# Allegro board backup.brd
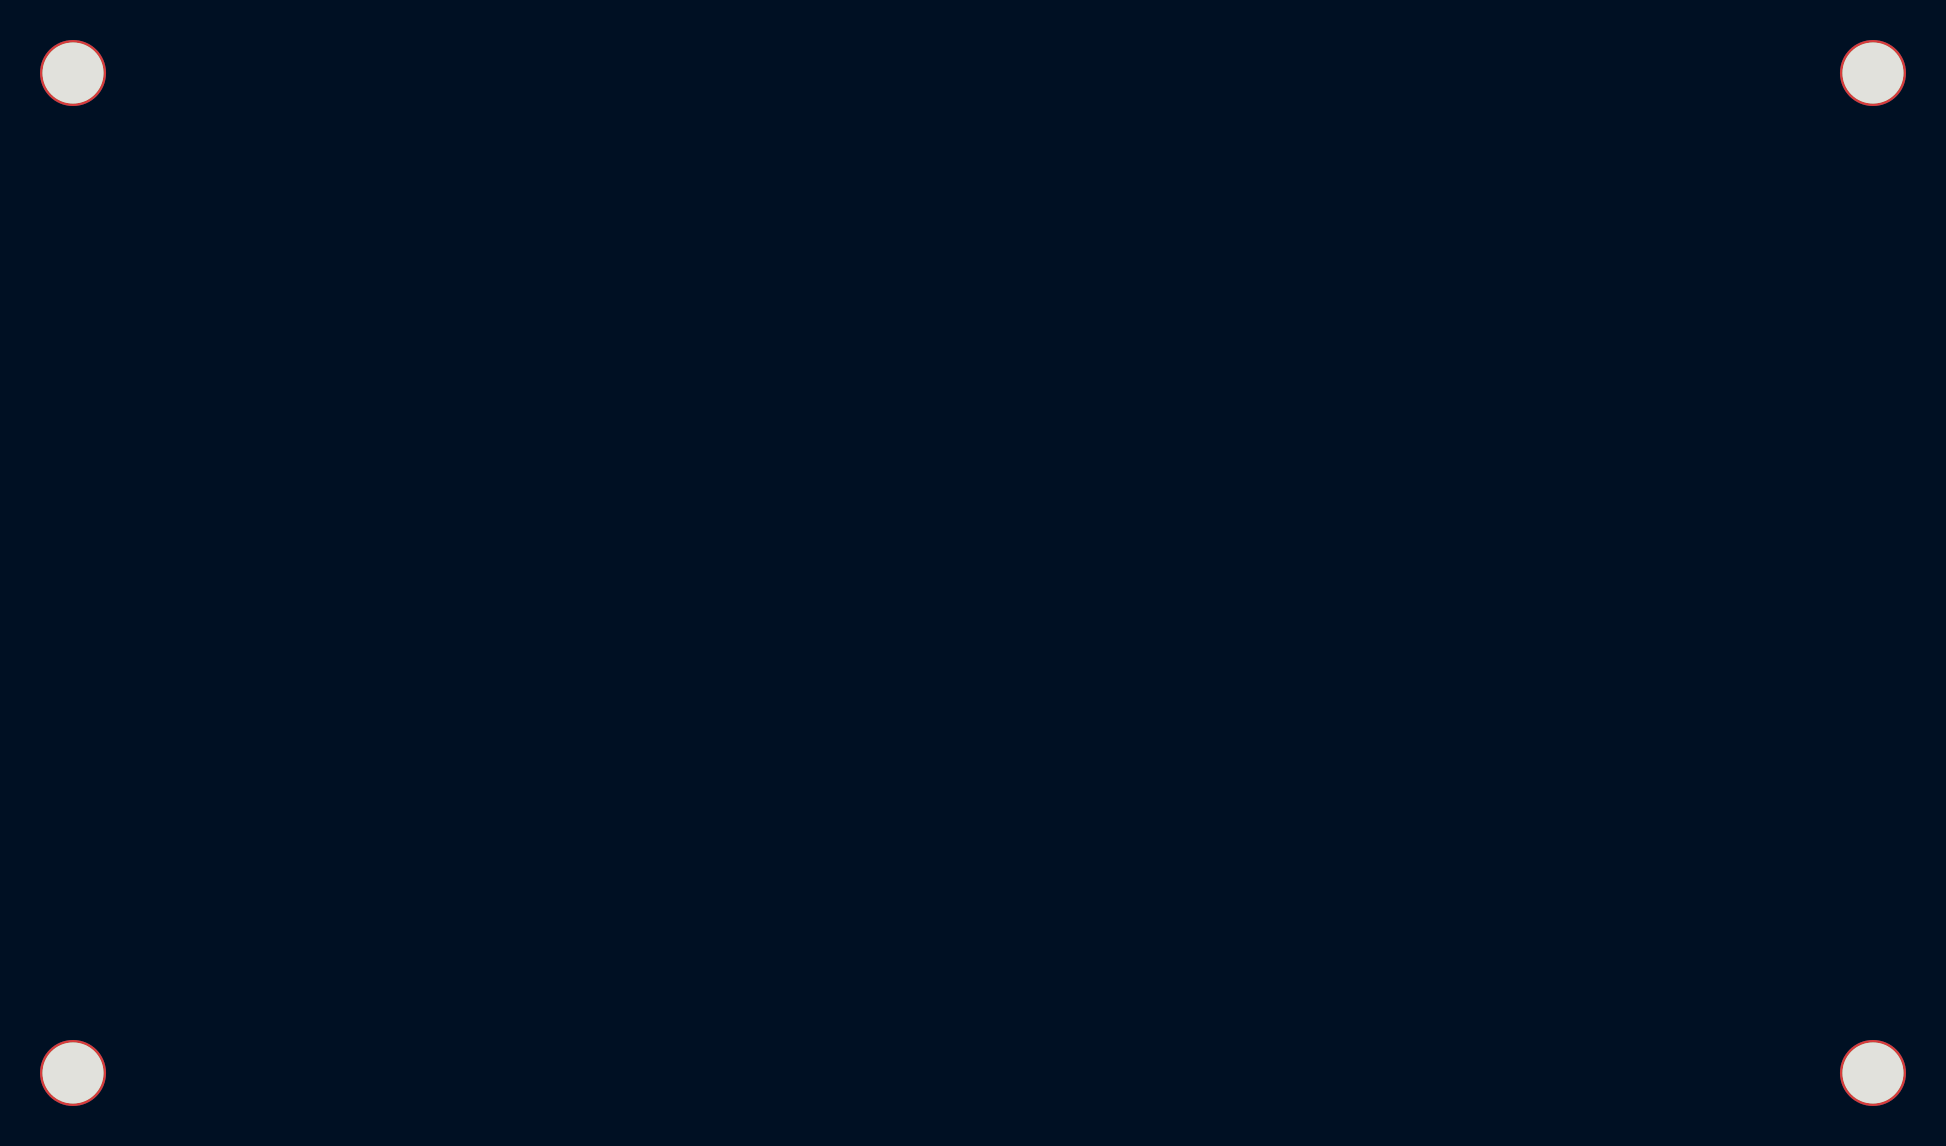
[diagram p0: board, top side]
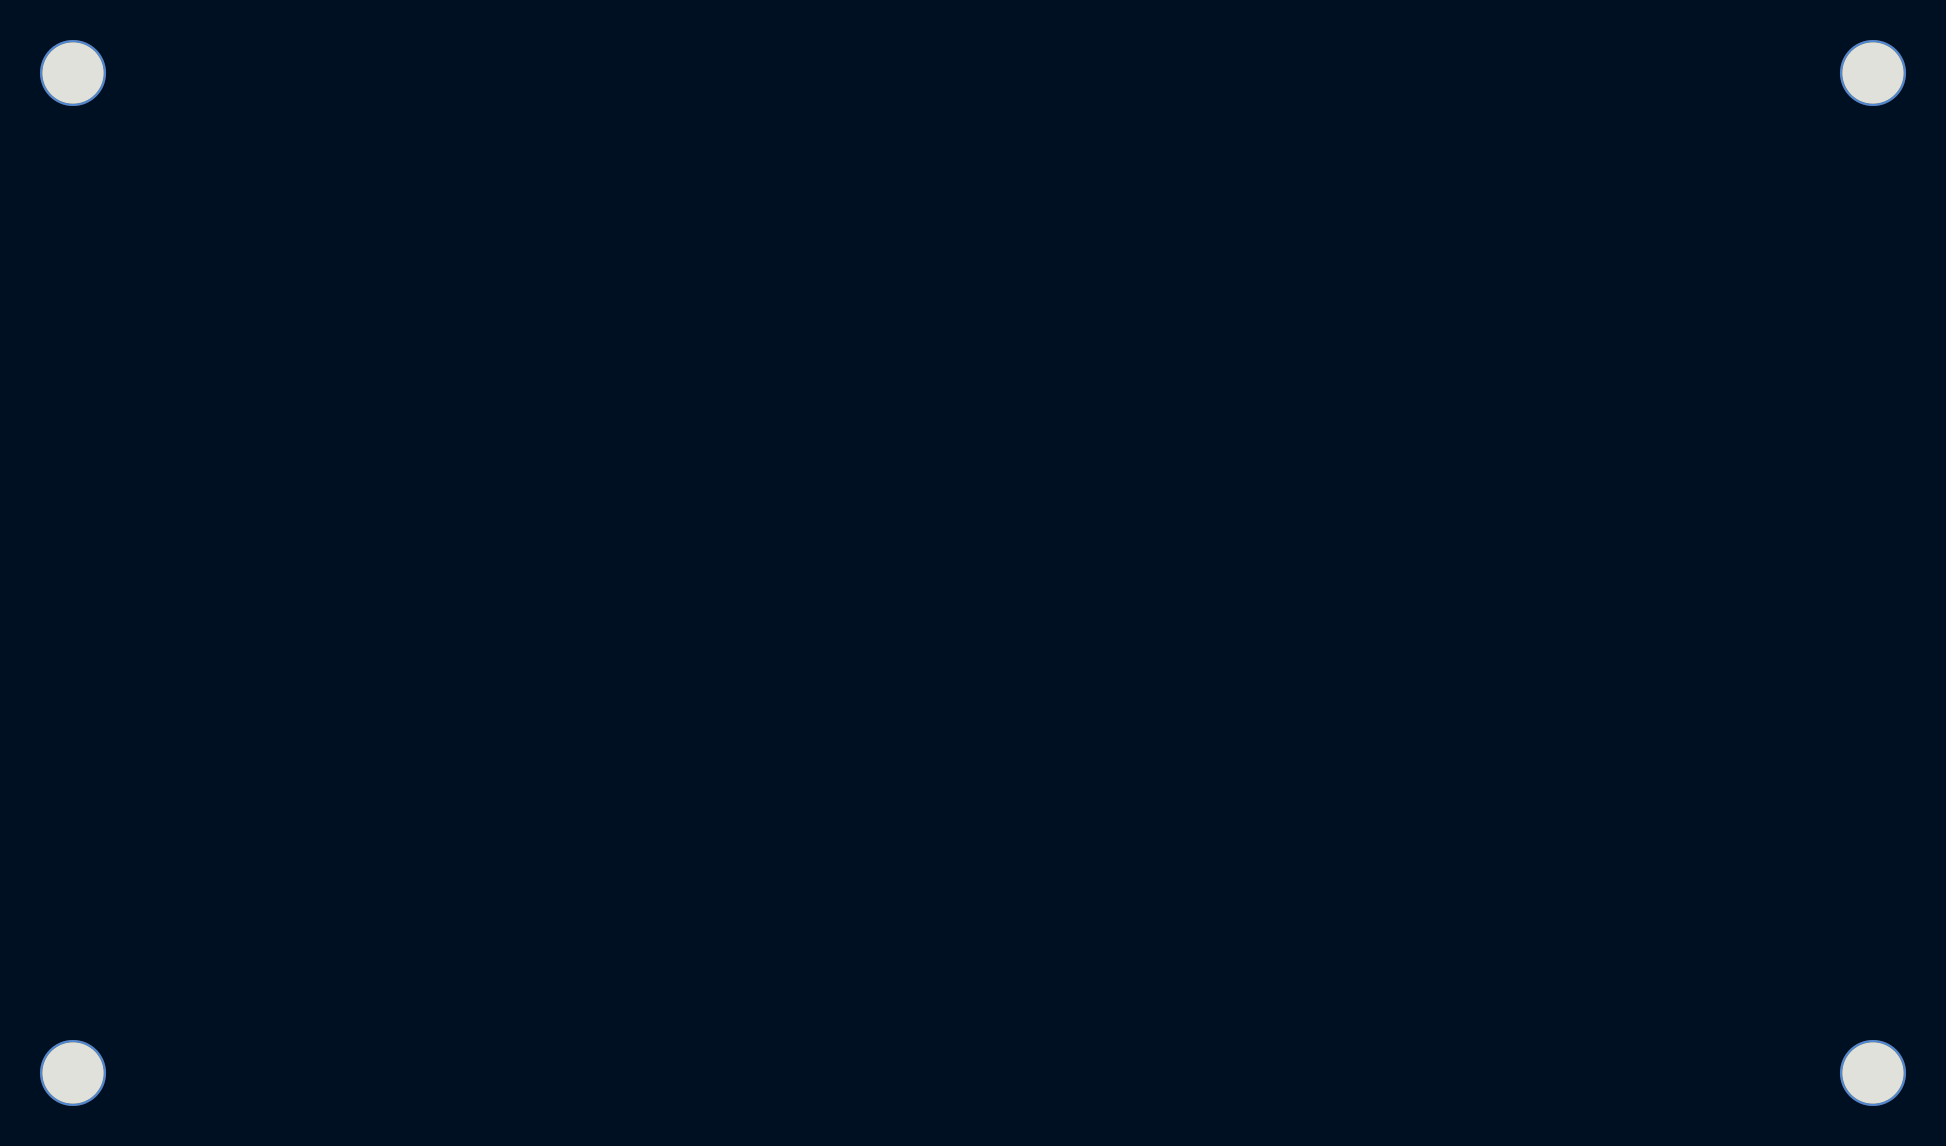
[diagram p1: board, bottom side, seen from below]

No outline. copper layers: TOP, BOTTOM. Coordinates in mm from the lowest, leftmost part position.

## Placement (name value [footprint] x y rotation side)
NOREF  -  [unnamed]  90 0 0 top
NOREF#2  -  [unnamed]  0 0 0 top
NOREF#3  -  [unnamed]  90 50 0 top
NOREF#4  -  [unnamed]  0 50 0 top

## Footprints (pads in the part's own frame, mm; a bottom-side part is the same pattern mirrored in y, then rotated)
unnamed
  round 3.302 hole 3.048: (0.013,-0.244)

## Nets
